# Altium PCB HS-IO-BaseBoard.PcbDoc (part 4 of 4)
Units mm, origin at the board's own origin, x right, y up, seen from the top; angles counter-clockwise.
Board outline 157.7 x 86.4 mm, 6 copper layers (Top Layer, MidLayer1, InternalPlane1, InternalPlane2, MidLayer2, Bottom Layer); 214 components, 240 nets, 782 pads, 260 vias.
Unrouted connection lines stored in the file: 101.
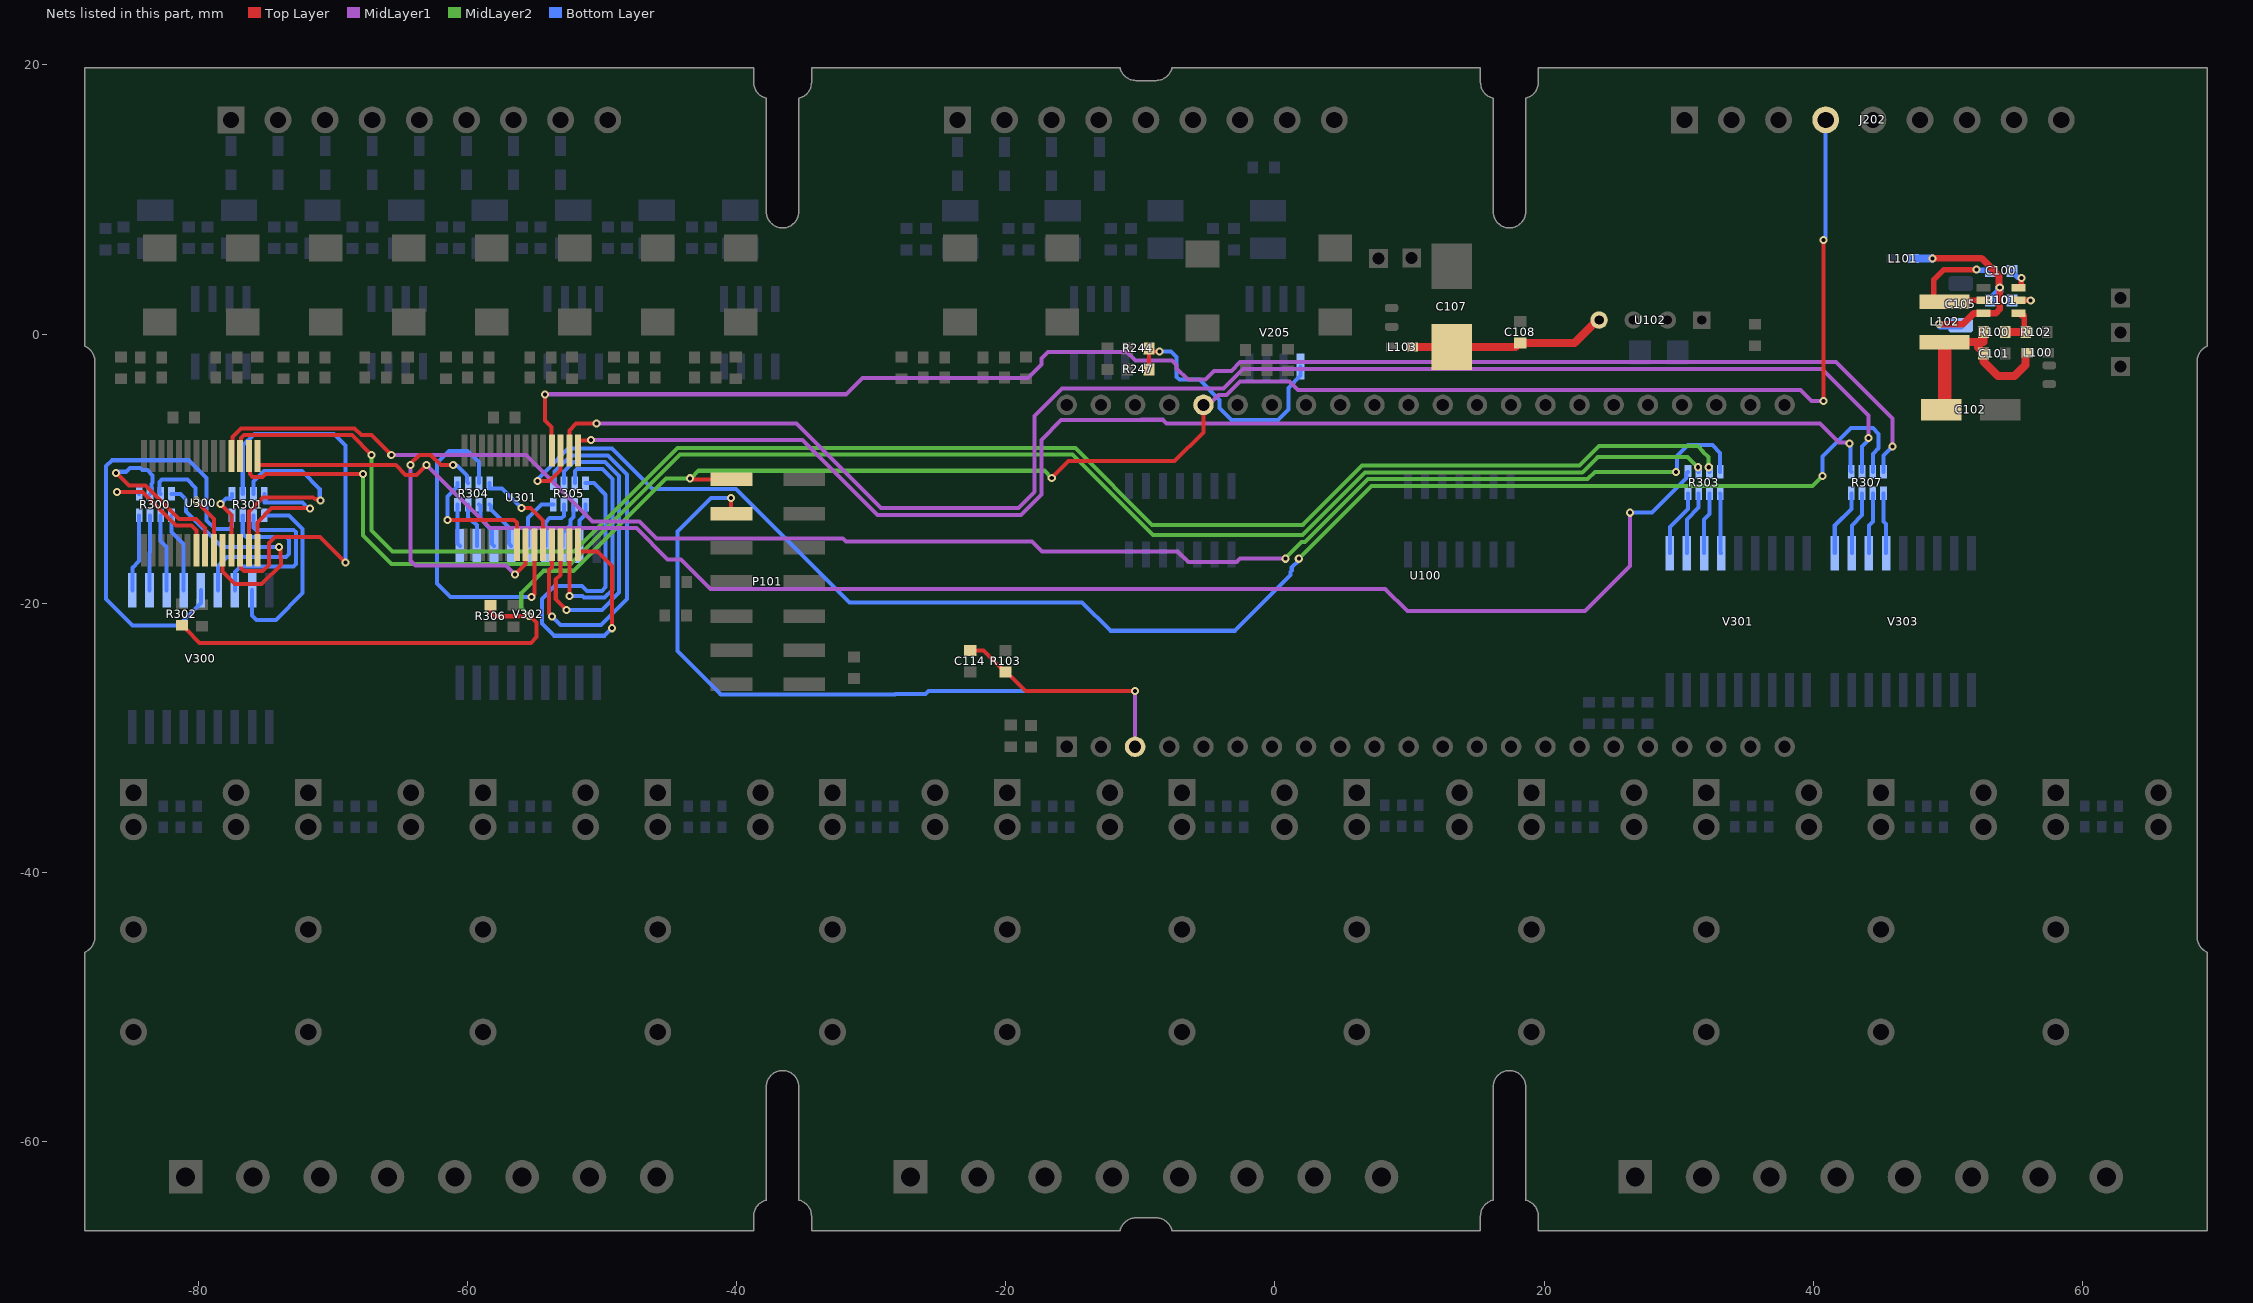
[diagram p7: the nets of this part, all layers, seen from the top]

## Via types
v1: diameter 0.6, hole 0.3, Top Layer to Bottom Layer, 260 vias

## Nets (pads, with @x,y where several pads share a name; then routed paths per layer and width w, separated by ;. In a path a pad name is that pad's centre, name@x,y a point inside that pad or via, vN(x,y) a via of type N, cw(c..) or ccw(c..) an arc to the next point about the centre after c; other vN are vias at no path point) (continued)
NetR244_1: R244.1 R247.1 V205.5 | length 19.2
  Top Layer w0.3: R247.1@-9.357,-2.622 R244.1@-9.357,-1.064 -9.121,-1.301 v1(-8.59,-1.301)
  Bottom Layer w0.3: v1(-8.59,-1.301) -7.71,-1.301 -7.297,-1.713 -7.297,-3.175 -7.088,-3.385 -5.611,-3.385 -4.105,-4.89 -4.105,-5.495 -3.23,-6.37 0.231,-6.37 0.998,-5.604 0.998,-3.992 1.915,-3.075 V205.5@1.915,-2.4
NetR300_1: R300.1 U300.21 | length 10.3
  Top Layer w0.3: v1(-86.029,-11.744) -84.128,-11.744 -81.639,-14.234 -80.485,-14.234 -80.129,-14.589 U300.21@-80.129,-16.058
  Bottom Layer w0.3: v1(-86.029,-11.744) -84.479,-11.744 -84.379,-11.844 R300.1@-84.379,-11.866
NetR300_2: R300.2 U300.22 | length 14.5
  Top Layer w0.3: v1(-86.092,-10.322) -86.072,-10.322 -85.15,-11.244 -83.92,-11.244 -81.431,-13.733 -80.154,-13.733 -79.479,-14.408 U300.22@-79.479,-16.058
  Bottom Layer w0.3: v1(-86.092,-10.322) -85.997,-10.226 -85.35,-10.226 -85.068,-9.944 -84.308,-9.944 -84.144,-10.108 -83.759,-10.108 -83.378,-10.489 -83.378,-11.028 -83.479,-11.129 -83.479,-11.766 R300.2@-83.579,-11.866
NetR300_3: R300.3 U300.23 | length 9.1
  Top Layer w0.3: v1(-80.123,-12.379) -80.123,-12.439 -78.829,-13.733 U300.23@-78.829,-16.058
  Bottom Layer w0.3: R300.3@-82.779,-11.866 -82.878,-11.768 -82.878,-10.976 -82.702,-10.8 -80.807,-10.8 -80.18,-11.426 -80.18,-12.301 v1@-80.123,-12.358
NetR300_4: R300.4 U300.24 | length 18.4
  Top Layer w0.3: U300.24@-78.179,-16.058 -78.179,-17.644 -77.253,-18.57 -75.277,-18.57 -73.849,-17.142 -73.849,-16.695 -73.896,-16.647 -73.896,-15.912 v1(-73.992,-15.816)
  Bottom Layer w0.3: R300.4@-81.979,-11.866 -81.979,-11.871 -81.317,-11.871 -80.885,-12.303 -80.885,-13.167 -78.236,-15.816 v1(-73.992,-15.816)
NetR300_5: R300.5 V300.4 | length 5.9
  Bottom Layer w0.3: R300.5@-81.979,-13.466 -81.979,-14.7 -81.074,-15.605 V300.4@-81.074,-19.028
NetR300_6: R300.6 V300.3 | length 5.7
  Bottom Layer w0.3: R300.6@-82.779,-13.466 -82.779,-15.373 -82.344,-15.808 V300.3@-82.344,-19.028
NetR300_7: R300.7 V300.2 | length 5.6
  Bottom Layer w0.3: V300.2@-83.614,-19.028 -83.614,-16.215 -83.579,-16.18 R300.7@-83.579,-13.466
NetR300_8: R300.8 V300.1 | length 5.8
  Bottom Layer w0.3: V300.1@-84.884,-19.028 -84.884,-17.358 -84.379,-16.853 R300.8@-84.379,-13.466
NetR301_1: R301.1 U300.25 | length 5.1
  Top Layer w0.3: v1(-78.345,-12.608) -77.529,-13.424 U300.25@-77.529,-16.058
  Bottom Layer w0.3: v1(-78.345,-12.608) -78.311,-12.608 -77.92,-12.216 -77.586,-12.216 -77.486,-12.116 R301.1@-77.486,-11.866
NetR301_2: R301.2 U300.26 | length 32.6
  Top Layer w0.3: U300.26@-76.879,-16.058 -76.804,-16.133 -76.804,-17.403 -76.599,-17.608 -75.209,-17.608 -74.742,-17.141 -74.742,-15.506 -74.303,-15.066 -70.935,-15.066 v1(-69.049,-16.952)
  Bottom Layer w0.3: R301.2@-76.686,-11.866 -76.686,-8.29 -75.823,-7.426 -69.913,-7.426 -69.049,-8.29 v1(-69.049,-16.952)
NetR301_3: R301.3 U300.27 | length 16.3
  Top Layer w0.3: U300.27@-76.229,-16.058 -76.229,-13.167 -75.191,-12.129 -71.458,-12.129 -71.328,-12.259 -70.991,-12.259 v1(-70.895,-12.355)
  Bottom Layer w0.3: R301.3@-75.886,-11.866 -75.886,-10.943 -75.113,-10.17 -72.3,-10.17 -70.965,-11.505 -70.965,-12.285 v1(-70.895,-12.355)
NetR301_4: R301.4 U300.28 | length 10.6
  Top Layer w0.3: U300.28@-75.579,-16.058 -75.579,-13.98 -74.535,-12.935 -71.713,-12.935 v1(-71.702,-12.946)
  Bottom Layer w0.3: R301.4@-75.086,-11.866 -75.086,-12.523 -72.26,-12.523 -71.837,-12.946 v1(-71.702,-12.946)
NetR301_5: R301.5 V300.8 | length 14.6
  Bottom Layer w0.3: V300.8@-75.994,-19.028 -75.994,-20.888 -75.657,-21.225 -74.222,-21.225 -72.242,-19.246 -72.242,-14.483 -73.259,-13.466 R301.5@-75.086,-13.466
NetR301_6: R301.6 V300.7 | length 12.7
  Bottom Layer w0.3: V300.7@-77.264,-19.028 -77.264,-17.674 -76.847,-17.256 -72.918,-17.256 -72.742,-17.081 -72.742,-14.714 -72.918,-14.538 -75.711,-14.538 -75.886,-14.363 R301.6@-75.886,-13.466
NetR301_7: R301.7 V300.6 | length 13.5
  Bottom Layer w0.3: V300.6@-78.534,-19.028 -78.534,-17.231 -77.87,-16.566 -73.486,-16.566 -73.242,-16.322 -73.242,-15.242 -73.418,-15.066 -76.446,-15.066 -76.686,-14.826 R301.7@-76.686,-13.466
NetR301_8: R301.8 V300.5 | length 33.8
  Bottom Layer w0.3: V300.5@-79.804,-19.028 -79.804,-19.981 -81.472,-21.648 -84.877,-21.648 -86.854,-19.671 -86.854,-9.814 -86.412,-9.372 -80.693,-9.372 -79.361,-10.703 -79.361,-13.83 -78.725,-14.466 -77.662,-14.466 -77.486,-14.291 R301.8@-77.486,-13.466
NetR303_1: R303.1 U300.1 | length 118.8
  Top Layer w0.3: U300.1@-75.579,-9.058 -75.579,-9.66 -75.504,-9.735 -65.318,-9.735 -64.587,-10.466 -63.779,-10.466 v1(-63.029,-9.716)
  MidLayer1 w0.3: v1(-63.029,-9.716) -58.331,-14.414 -47.432,-14.414 -45.114,-16.732 -44.122,-16.732 -41.918,-18.937 8.195,-18.937 9.845,-20.587 23.023,-20.587 26.379,-17.231 v1(26.379,-13.268)
  Bottom Layer w0.3: v1(26.379,-13.268) 28.001,-13.268 30.286,-10.983 30.287,-10.983 30.581,-10.69 30.581,-10.333 R303.1@30.681,-10.233
NetR303_2: R303.2 U300.2 | length 123.5
  Top Layer w0.3: U300.2@-76.229,-9.058 -76.154,-9.133 -76.154,-10.403 -75.949,-10.608 -75.209,-10.608 -74.986,-10.385 v1(-67.763,-10.385)
  MidLayer2 w0.3: v1(-67.763,-10.385) -67.763,-14.968 -65.65,-17.081 -52.318,-17.081 -44.195,-8.957 -15.034,-8.957 -9.053,-14.939 2.037,-14.939 6.701,-10.275 22.832,-10.275 23.984,-9.123 30.662,-9.123 v1(31.431,-9.892)
  Bottom Layer w0.3: v1(31.431,-9.892) 31.431,-10.183 R303.2@31.481,-10.233
NetR303_3: R303.3 U300.3 | length 126.8
  Top Layer w0.3: U300.3@-76.879,-9.058 -76.804,-8.983 -76.804,-7.713 -76.599,-7.508 -68.574,-7.508 v1(-67.116,-8.966)
  MidLayer2 w0.3: v1(-67.116,-8.966) -67.116,-10.217 -67.113,-10.22 -67.113,-10.758 -67.116,-10.761 -67.116,-14.592 -65.569,-16.139 -52.083,-16.139 -45.405,-9.46 -44.402,-8.457 -14.827,-8.457 -9.12,-14.164 2.065,-14.164 6.454,-9.775 22.625,-9.775 24.077,-8.323 31.437,-8.323 31.818,-8.704 31.818,-8.742 32.218,-9.142 32.218,-9.879 v1(32.231,-9.892)
  Bottom Layer w0.3: v1(32.231,-9.892) 32.281,-9.942 R303.3@32.281,-10.233
NetR303_4: R303.4 U300.4 | length 122.3
  Top Layer w0.3: U300.4@-77.529,-9.058 -77.454,-8.983 -77.454,-7.656 -76.806,-7.008 -68.367,-7.008 -67.867,-7.508 -67.108,-7.508 v1(-65.65,-8.966)
  MidLayer1 w0.3: v1(-65.65,-8.966) -55.654,-8.966 -50.705,-13.914 -47.225,-13.914 -45.95,-15.189 -32.109,-15.189 -31.875,-15.422 -18.033,-15.422 -17.319,-16.137 -7.24,-16.137 -6.44,-16.937 -2.838,-16.937 -2.588,-16.687 v1(0.772,-16.687)
  MidLayer2 w0.3: v1(0.772,-16.687) 0.772,-16.626 1.959,-15.439 2.244,-15.439 6.908,-10.775 23.222,-10.775 23.763,-10.233 v1(29.791,-10.233)
  Bottom Layer w0.3: v1(29.791,-10.233) 29.878,-10.146 29.878,-9.07 30.704,-8.244 32.505,-8.244 33.081,-8.82 R303.4@33.081,-10.233
NetR303_5: R303.5 V301.4 | length 4.5
  Bottom Layer w0.3: R303.5@33.081,-11.833 33.116,-11.868 33.116,-16.243 V301.4@33.151,-16.278
NetR303_6: R303.6 V301.3 | length 4.6
  Bottom Layer w0.3: V301.3@31.881,-16.278 31.881,-13.758 32.281,-13.358 R303.6@32.281,-11.833
NetR303_7: R303.7 V301.2 | length 4.8
  Bottom Layer w0.3: V301.2@30.611,-16.278 30.611,-13.758 31.481,-12.888 R303.7@31.481,-11.833
NetR303_8: R303.8 V301.1 | length 5
  Bottom Layer w0.3: V301.1@29.341,-16.278 29.341,-14.321 30.681,-12.981 R303.8@30.681,-11.833
NetR304_1: R304.1 U301.21 | length 9.9
  Top Layer w0.3: v1(-61.488,-13.802) -56.527,-13.802 -56.315,-14.013 U301.21@-56.315,-15.641
  Bottom Layer w0.3: v1(-61.488,-13.802) -61.488,-12.066 -60.738,-11.316 R304.1@-60.738,-11.066
NetR304_2: R304.2 U301.22 | length 23.7
  Top Layer w0.3: v1(-64.234,-9.716) -64.234,-9.63 -63.57,-8.966 -62.719,-8.966 -61.969,-9.716 v1(-61.048,-9.716) ; v1(-56.451,-17.866) -55.665,-17.081 U301.22@-55.665,-15.641
  MidLayer1 w0.3: v1(-64.234,-9.716) -64.234,-16.837 -63.866,-17.205 -57.111,-17.205 v1(-56.451,-17.866)
  Bottom Layer w0.3: v1(-61.048,-9.716) -60.952,-9.812 -60.747,-9.812 -60.038,-10.521 -60.038,-10.966 R304.2@-59.938,-11.066
NetR304_3: R304.3 U301.23 | length 25.8
  Top Layer w0.3: v1(-55.231,-19.542) -55.015,-19.326 U301.23@-55.015,-15.641
  Bottom Layer w0.3: R304.3@-59.138,-11.066 -59.138,-9.509 -59.977,-8.67 -61.359,-8.67 -62.254,-9.565 -62.254,-18.529 -61.241,-19.542 v1(-55.231,-19.542)
NetR304_4: R304.4 U301.24 | length 7.1
  Top Layer w0.3: v1(-55.968,-12.913) -55.308,-12.913 -54.365,-13.855 U301.24@-54.365,-15.641
  Bottom Layer w0.3: R304.4@-58.338,-11.066 -58.338,-11.465 -57.416,-11.465 v1(-55.968,-12.913)
NetR304_5: R304.5 V302.4 | length 3.7
  Bottom Layer w0.3: R304.5@-58.338,-12.666 -58.238,-12.766 -58.238,-13.03 -56.917,-14.351 -56.917,-15.569 V302.4@-56.749,-15.736
NetR304_6: R304.6 V302.3 | length 3.5
  Bottom Layer w0.3: R304.6@-59.138,-12.666 -59.038,-12.766 -59.038,-13.704 -58.187,-14.555 -58.187,-15.569 V302.3@-58.019,-15.736
NetR304_7: R304.7 V302.2 | length 3.4
  Bottom Layer w0.3: R304.7@-59.938,-12.666 -59.938,-13.676 -59.289,-14.166 V302.2@-59.289,-15.736
NetR304_8: R304.8 V302.1 | length 3.1
  Bottom Layer w0.3: R304.8@-60.738,-12.666 -60.738,-14.441 -60.727,-14.452 -60.727,-15.569 V302.1@-60.559,-15.736
NetR305_1: R305.1 U301.25 | length 28.8
  Top Layer w0.3: v1(-53.715,-20.978) -53.933,-20.761 -53.933,-17.541 -53.715,-17.324 U301.25@-53.715,-15.641
  Bottom Layer w0.3: v1(-53.715,-20.978) -53.094,-21.6 -50.061,-21.6 -48.131,-19.669 -48.131,-10.436 -49.556,-9.01 -52.308,-9.01 -53.515,-10.217 -53.515,-10.966 R305.1@-53.615,-11.066
NetR305_2: R305.2 U301.26 | length 24.1
  Top Layer w0.3: U301.26@-53.065,-15.641 -53.065,-17.88 -53.433,-18.247 -53.433,-19.669 v1(-52.62,-20.482)
  Bottom Layer w0.3: R305.2@-52.815,-11.066 -52.815,-10.224 -52.101,-9.51 -49.763,-9.51 -48.722,-10.551 -48.722,-19.206 -49.998,-20.482 v1(-52.62,-20.482)
NetR305_3: R305.3 U301.27 | length 19.6
  Top Layer w0.3: v1(-52.415,-19.466) U301.27@-52.415,-15.641
  Bottom Layer w0.3: v1(-52.415,-19.466) -51.438,-19.466 -51.323,-19.581 -49.804,-19.581 -49.222,-18.999 -49.222,-10.758 -49.971,-10.01 -51.839,-10.01 -52.015,-10.186 R305.3@-52.015,-11.066
NetR305_4: R305.4 U301.28 | length 29.9
  Top Layer w0.3: U301.28@-51.765,-15.641 -51.765,-16.139 -50.329,-16.139 -49.237,-17.231 v1(-49.237,-21.85)
  Bottom Layer w0.3: R305.4@-51.215,-11.066 -50.59,-11.066 -49.722,-11.934 -49.722,-18.792 -50.011,-19.081 -51.116,-19.081 -51.484,-18.713 -53.509,-18.713 -54.465,-19.669 -54.465,-21.507 -53.564,-22.408 -49.795,-22.408 v1(-49.237,-21.85)
NetR305_5: R305.5 V302.8 | length 3.3
  Bottom Layer w0.3: V302.8@-51.669,-15.736 -51.669,-13.853 -51.215,-13.398 R305.5@-51.215,-12.666
NetR305_6: R305.6 V302.7 | length 3.5
  Bottom Layer w0.3: V302.7@-52.939,-15.736 -52.939,-14.784 -52.347,-14.192 -52.347,-13.824 -52.115,-13.591 -52.115,-12.766 R305.6@-52.015,-12.666
NetR305_7: R305.7 V302.6 | length 4.2
  Bottom Layer w0.3: V302.6@-54.209,-15.736 -54.209,-13.98 -53.904,-13.675 -52.991,-13.675 -52.815,-13.499 R305.7@-52.815,-12.666
NetR305_8: R305.8 V302.5 | length 4.4
  Bottom Layer w0.3: V302.5@-55.479,-15.736 -55.479,-13.643 -54.495,-12.659 -53.615,-12.659 R305.8@-53.615,-12.666
NetR307_1: R307.1 U301.1 | length 105.7
  Top Layer w0.3: U301.1@-51.765,-8.641 -51.765,-7.969 -51.69,-7.894 -50.841,-7.894 v1(-50.806,-7.858)
  MidLayer1 w0.3: v1(-50.806,-7.858) -35.083,-7.858 -29.519,-13.422 -18.862,-13.422 -17.358,-11.919 -17.358,-7.852 -15.877,-6.37 -9.929,-6.37 -9.921,-6.362 -8.319,-6.362 -8.04,-6.641 40.508,-6.641 41.905,-8.038 42.584,-8.038 v1(42.68,-8.133)
  Bottom Layer w0.3: v1(42.68,-8.133) 42.75,-8.204 42.75,-10.163 R307.1@42.821,-10.233
NetR307_2: R307.2 U301.2 | length 114.2
  Top Layer w0.3: U301.2@-52.415,-8.641 -52.415,-7.149 -51.912,-6.646 v1(-50.399,-6.646)
  MidLayer1 w0.3: v1(-50.399,-6.646) -35.538,-6.646 -29.262,-12.922 -19.069,-12.922 -17.858,-11.712 -17.858,-6.075 -15.809,-4.025 -3.816,-4.025 -2.374,-2.583 40.657,-2.583 44.106,-6.032 v1(44.106,-7.719)
  Bottom Layer w0.3: R307.2@43.621,-10.233 43.621,-8.339 44.106,-7.854 v1(44.106,-7.719)
NetR307_3: R307.3 U301.3 | length 120.4
  Top Layer w0.3: v1(-54.774,-10.906) -53.9,-10.906 -53.081,-10.087 -53.081,-8.657 U301.3@-53.065,-8.641
  MidLayer2 w0.3: v1(1.772,-16.687) 7.183,-11.275 39.932,-11.275 v1(40.665,-10.542)
  Bottom Layer w0.3: v1(-54.774,-10.906) -54.774,-10.771 -54.542,-10.538 -54.542,-10.537 -54.015,-10.01 -52.515,-8.51 -49.247,-8.51 -46.241,-11.516 -40.041,-11.516 -31.613,-19.945 -14.321,-19.945 -12.229,-22.037 -2.978,-22.037 1.164,-17.894 1.164,-17.661 1.248,-17.577 1.248,-17.345 1.772,-16.822 v1(1.772,-16.687) ; v1(40.665,-10.542) 40.665,-9.087 42.784,-6.969 44.416,-6.969 44.856,-7.408 44.856,-8.478 44.421,-8.913 R307.3@44.421,-10.233
NetR307_4: R307.4 U301.4 | length 113.5
  Top Layer w0.3: v1(-54.216,-4.482) -54.216,-6.422 -53.824,-6.813 -53.738,-6.9 -53.738,-7.591 U301.4@-53.715,-8.641
  MidLayer1 w0.3: v1(-54.216,-4.482) -54.203,-4.468 -31.862,-4.468 -30.654,-3.26 -18.341,-3.26 -17.35,-2.269 -17.35,-1.824 -16.851,-1.325 -11.006,-1.325 -10.368,-1.963 -7.634,-1.963 -7.297,-2.299 -7.297,-2.549 -6.472,-3.375 -5.172,-3.375 -4.522,-2.725 -3.223,-2.725 -2.581,-2.083 41.668,-2.083 45.871,-6.286 v1(45.871,-8.353)
  Bottom Layer w0.3: R307.4@45.221,-10.233 45.221,-9.003 v1(45.871,-8.353)
NetR307_5: R307.5 V303.4 | length 4.5
  Bottom Layer w0.3: R307.5@45.221,-11.833 45.221,-13.918 45.401,-14.098 V303.4@45.401,-16.278
NetR307_6: R307.6 V303.3 | length 4.6
  Bottom Layer w0.3: V303.3@44.131,-16.278 44.131,-14.208 44.421,-13.918 R307.6@44.421,-11.833
NetR307_7: R307.7 V303.2 | length 4.8
  Bottom Layer w0.3: V303.2@42.861,-16.278 42.861,-14.208 43.621,-13.448 R307.7@43.621,-11.833
NetR307_8: R307.8 V303.1 | length 5
  Bottom Layer w0.3: V303.1@41.591,-16.278 41.591,-14.208 42.821,-12.978 R307.8@42.821,-11.833
P5V: C107.1 C108.2 L103.1 U102.4 | length 14.7
  Top Layer w0.6: L103.1@10.219,-0.959 C107.1@13.129,-0.959 17.879,-0.959 18.179,-0.659 22.265,-0.659 23.97,1.046 U102.4@24.081,1.046
R\E\S\E\T\: J202.4 P101.14 R302.2 R306.2 U100.40 | length 166.6
  Top Layer w0.3: R302.2@-81.204,-21.625 -81.154,-21.625 -80.904,-21.875 -80.904,-21.925 -79.884,-22.946 -55.282,-22.946 -54.85,-22.514 -54.85,-21.422 -55.308,-20.965 -57.99,-20.965 -58.015,-20.939 ; R306.2@-58.269,-20.148 -58.269,-20.685 -58.015,-20.939 ; v1(-55.409,-20.939) -58.015,-20.939 ; v1(-43.458,-10.71) -43.38,-10.788 P101.14@-40.379,-10.788 ; v1(-16.582,-10.695) -15.322,-9.436 -7.452,-9.436 -5.31,-7.294 U100.40@-5.31,-5.258 ; v1(40.771,-4.956) v1(40.771,6.992)
  MidLayer1 w0.3: U100.40@-5.31,-5.258 -4.926,-5.258 -4.192,-4.525 -3.609,-4.525 -2.608,-3.525 1.075,-3.525 1.697,-4.146 39.038,-4.146 39.847,-4.956 v1(40.771,-4.956)
  MidLayer2 w0.3: v1(-55.409,-20.939) -55.993,-20.355 -55.993,-19.237 -54.337,-17.581 -52.111,-17.581 -45.241,-10.71 -43.377,-10.71 -42.816,-10.15 -17.127,-10.15 v1(-16.582,-10.695)
  Bottom Layer w0.3: v1(40.771,6.992) 40.771,7.073 40.921,7.223 J202.4@40.921,15.917
"TASTER RESET": C114.2 P101.12 R103.1 U100.3 | length 68.1
  Top Layer w0.3: v1(-40.398,-12.166) -40.398,-13.31 P101.12@-40.379,-13.328 ; C114.2@-22.633,-23.502 -21.658,-23.502 -20.058,-25.102 -19.958,-25.102 -18.532,-26.528 v1(-10.409,-26.528)
  MidLayer1 w0.3: v1(-10.409,-26.528) -10.399,-26.538 -10.399,-30.649 U100.3@-10.39,-30.658
  Bottom Layer w0.3: v1(-40.398,-12.166) -41.891,-12.166 -44.394,-14.669 -44.394,-23.556 -41.172,-26.778 -28.224,-26.778 -28.179,-26.733 -25.956,-26.733 -25.751,-26.528 v1(-10.409,-26.528)
U304_BST: C100.1 U101.6 | length 1.9
  Top Layer w0.4: U101.6@55.251,3.452 55.363,3.452 55.438,3.527 55.438,4.147 v1(55.476,4.185)
  Bottom Layer w0.4: C100.1@54.751,4.702 54.751,4.652 55.18,4.223 55.438,4.223 v1(55.476,4.185)
U304_EN: R101.1 U101.5 | length 2.3
  Top Layer w0.4: U101.5@55.251,2.502 v1(56.151,2.502)
  Bottom Layer w0.4: R101.1@54.751,2.502 v1(56.151,2.502)
U304_FB: R100.1 R102.2 U101.4 | length 11.3
  Top Layer w0.3: U101.4@55.476,1.527 U101.4@55.476,1.552 ; U101.4@55.251,1.552 U101.4@55.476,1.552 ; U101.4@55.251,1.552 U101.4@55.476,1.552 ; U101.4@55.251,1.552 U101.4@55.476,1.552 ; U101.4@55.251,1.552 U101.4@55.476,1.552 ; U101.4@55.251,1.552 U101.4@55.476,1.552 ; U101.4@55.251,1.552 U101.4@55.476,1.552 ; U101.4@55.251,1.552 U101.4@55.476,1.552 ; U101.4@55.251,1.552 U101.4@55.476,1.552 ; U101.4@55.251,1.552 U101.4@55.476,1.552 ; U101.4@55.251,1.552 U101.4@55.476,1.552 ; U101.4@55.251,1.552 U101.4@55.476,1.552 ; U101.4@55.251,1.552 U101.4@55.476,1.552 ; U101.4@55.251,1.552 U101.4@55.476,1.552 ; U101.4@55.251,1.552 U101.4@55.476,1.552 ; U101.4@55.251,1.552 U101.4@55.476,1.552 ; U101.4@55.251,1.552 U101.4@55.476,1.552 ; U101.4@55.251,1.552 U101.4@55.476,1.552 ; U101.4@55.251,1.552 U101.4@55.476,1.552 ; U101.4@55.251,1.552 U101.4@55.476,1.552
  Top Layer w0.4: U101.4@55.476,1.527 55.526,1.527 U101.4@55.676,1.377 ; R102.2@55.776,0.152 55.676,0.252 U101.4@55.676,1.377 ; U101.4@55.251,1.552 U101.4@55.426,1.377 ; U101.4@55.251,1.552 U101.4@55.426,1.377 ; U101.4@55.251,1.552 U101.4@55.426,1.377 ; U101.4@55.251,1.552 U101.4@55.426,1.377 ; U101.4@55.251,1.552 U101.4@55.426,1.377 ; U101.4@55.251,1.552 U101.4@55.426,1.377 ; U101.4@55.251,1.552 U101.4@55.426,1.377 ; U101.4@55.251,1.552 U101.4@55.426,1.377 ; U101.4@55.426,1.377 U101.4@55.676,1.377 ; U101.4@55.426,1.377 U101.4@55.676,1.377 ; U101.4@55.426,1.377 U101.4@55.676,1.377 ; U101.4@55.426,1.377 U101.4@55.676,1.377 ; U101.4@55.426,1.377 U101.4@55.676,1.377 ; U101.4@55.426,1.377 U101.4@55.676,1.377 ; U101.4@55.426,1.377 U101.4@55.676,1.377 ; U101.4@55.426,1.377 U101.4@55.676,1.377
  Top Layer w0.6: R100.1@54.251,0.152 R102.2@55.776,0.152
U304_SW: C100.2 L102.1 U101.2 | length 9.7
  Top Layer w0.4: L102.1@49.751,2.402 51.051,2.402 51.151,2.502 U101.2@52.651,2.502 ; L102.1@49.751,2.502 49.201,2.502 48.951,2.752 48.951,4.042 49.702,4.793 v1(52.128,4.793)
  Bottom Layer w0.4: v1(52.128,4.793) 52.173,4.748 53.105,4.748 C100.2@53.151,4.702
U304_Vin: C105.1 L101.2 R101.2 U101.3 | length 17.3
  Top Layer w0.5: v1(48.844,5.617) 48.87,5.643 52.48,5.643 53.793,4.329 53.793,3.51 v1(53.851,3.452) 53.851,1.845 53.558,1.552 U101.3@52.651,1.552 52.626,1.527 51.912,1.527 51.126,0.741 v1(49.351,0.741)
  Bottom Layer w0.6: L101.2@47.421,5.617 v1(48.844,5.617) ; v1(49.351,0.741) 49.44,0.652 C105.1@50.951,0.652 ; R101.2@53.151,2.502 53.151,2.552 53.812,3.214 53.812,3.414 v1(53.851,3.452)
Vout: C101.2 C102.1 L100.1 L102.2 R100.2 | length 14.9
  Top Layer w0.6: L102.2@49.751,-0.598 52.226,-0.598 52.226,-0.973 52.651,-1.398 C101.2@52.651,-1.448 52.651,-2.046 53.725,-3.12 54.955,-3.12 55.771,-2.305 55.771,-1.431 55.821,-1.381 L100.1@55.896,-1.381 ; 52.651,-0.598 R100.2@52.651,0.152
  Top Layer w1: C102.1@49.496,-5.608 49.496,-5.563 49.751,-5.308 L102.2@49.751,-0.598
pads on no net: U100.14 U100.21 U100.25 U100.26 U100.28 U100.29 U100.30 U100.31 U100.32 U100.33 U100.34 U100.35 U100.36 U100.37 U100.38 U100.39 U100.41 U100.42 U100.43 U300.5 U300.6 U300.7 U300.8 U300.11 U300.14 U300.19 U300.20 U301.5 U301.6 U301.7 U301.8 U301.11 U301.14 U301.19 U301.20 V301.5 V301.6 V301.7 V301.8 V301.11 V301.12 V301.13 V301.14 V303.5 V303.6 V303.7 V303.8 V303.11 V303.12 V303.13 V303.14

## Polygon pours and split planes (outlines as drawn)
Gnd on InternalPlane1 (split plane): 7.711,11.894 -7.163,11.894 -7.163,19.281 7.711,19.281
Gnd on InternalPlane1 (split plane): 68.756,-0.598 68.636,-0.687 68.512,-0.799 68.399,-0.924 68.299,-1.058 68.213,-1.202 68.141,-1.354 68.084,-1.512 68.044,-1.675 68.019,-1.841 68.011,-2 68.01,-2.008 68.01,-39.058 -87.169,-39.058 -87.169,-2.008 -87.17,-1.999 -87.177,-1.841 -87.202,-1.675 -87.243,-1.512 -87.299,-1.354 -87.371,-1.202 -87.457,-1.058 -87.557,-0.924 -87.67,-0.799 -87.794,-0.687 -87.914,-0.597 -87.915,-0.259 -87.892,-0.261 4.115,-0.261 4.115,-2.176 4.123,-2.306 4.149,-2.435 4.191,-2.559 4.249,-2.677 4.322,-2.786 4.408,-2.884 4.507,-2.971 4.616,-3.043 4.733,-3.101 4.857,-3.144 4.986,-3.169 5.117,-3.178 28.521,-3.178 28.652,-3.169 28.78,-3.144 28.904,-3.101 29.022,-3.043 29.131,-2.971 29.229,-2.884 29.316,-2.786 29.389,-2.677 29.447,-2.559 29.489,-2.435 29.514,-2.306 29.523,-2.176 29.523,7.792 29.514,7.922 29.489,8.051 29.447,8.175 29.389,8.293 29.316,8.402 29.229,8.5 29.131,8.587 29.022,8.659 28.904,8.717 28.78,8.76 28.652,8.785 28.521,8.794 19.103,8.794 19.123,8.924 19.13,9.083 19.131,9.092 19.131,17.17 19.167,17.187 19.313,17.274 19.449,17.375 19.575,17.489 19.689,17.615 19.79,17.751 19.877,17.896 19.949,18.05 20.006,18.209 20.048,18.374 20.073,18.542 20.08,18.703 20.081,18.711 20.081,19.281 68.76,19.281
I-GND on InternalPlane1 (split plane): 175 vertices, not listed, extent -87.919,-1.173 27.519,19.281
12V on InternalPlane2 (split plane): 7.711,11.894 -7.163,11.894 -7.163,19.281 7.711,19.281
12V on InternalPlane2 (split plane): 68.01,-39.058 -87.169,-39.058 -87.169,-32.834 68.01,-32.834
I5V on InternalPlane2 (split plane): 175 vertices, not listed, extent -87.919,-1.173 27.519,19.281
3V3p on InternalPlane2 (split plane): 68.756,-0.598 68.636,-0.687 68.512,-0.799 68.399,-0.924 68.299,-1.058 68.213,-1.202 68.141,-1.354 68.084,-1.512 68.044,-1.675 68.019,-1.841 68.011,-2 68.01,-2.008 68.01,-31.829 -87.169,-31.829 -87.169,-2.008 -87.17,-1.999 -87.177,-1.841 -87.202,-1.675 -87.243,-1.512 -87.299,-1.354 -87.371,-1.202 -87.457,-1.058 -87.557,-0.924 -87.67,-0.799 -87.794,-0.687 -87.914,-0.597 -87.915,-0.259 -87.892,-0.261 4.115,-0.261 4.115,-2.176 4.123,-2.306 4.149,-2.435 4.191,-2.559 4.249,-2.677 4.322,-2.786 4.408,-2.884 4.507,-2.971 4.616,-3.043 4.733,-3.101 4.857,-3.144 4.986,-3.169 5.117,-3.178 28.521,-3.178 28.652,-3.169 28.78,-3.144 28.904,-3.101 29.022,-3.043 29.131,-2.971 29.229,-2.884 29.316,-2.786 29.389,-2.677 29.447,-2.559 29.489,-2.435 29.514,-2.306 29.523,-2.176 29.523,7.792 29.514,7.922 29.489,8.051 29.447,8.175 29.389,8.293 29.316,8.402 29.229,8.5 29.131,8.587 29.022,8.659 28.904,8.717 28.78,8.76 28.652,8.785 28.521,8.794 19.103,8.794 19.123,8.924 19.13,9.083 19.131,9.092 19.131,17.17 19.167,17.187 19.313,17.274 19.449,17.375 19.575,17.489 19.689,17.615 19.79,17.751 19.877,17.896 19.949,18.05 20.006,18.209 20.048,18.374 20.073,18.542 20.08,18.703 20.081,18.711 20.081,19.281 68.76,19.281

## Keep-outs
Top Layer:
  region: -88.429,10.092 -88.429,7.592 69.271,7.592 69.271,10.092
  region: 69.271,-57.158 69.271,-54.658 -88.429,-54.658 -88.429,-57.158
Keep-Out Layer:
  lines w0.1: -87.679,-20.058 -87.679,-2.008 ccw(c-88.879,-2.008) -88.425,-0.898 -88.429,19.792 -38.729,19.792 -38.729,18.711 ccw(c-37.511,18.711) -37.778,17.522 ; -37.879,8.892 ccw(c-36.679,8.892) -35.479,8.892 ; -37.779,9.092 -37.779,17.522 ; -35.381,17.522 ccw(c-35.647,18.711) -34.429,18.711 -34.429,19.792 -11.504,19.792 ; -35.379,9.092 -35.379,17.522 ; -22.679,-66.609 -11.503,-66.609 cw(c-10.329,-66.858) -10.329,-65.658 -8.829,-65.658 cw(c-8.829,-66.858) -7.655,-66.609 15.271,-66.608 15.271,-65.528 cw(c16.489,-65.528) 16.222,-64.339 ; -11.503,19.792 ccw(c-10.329,20.042) -10.329,18.842 -8.829,18.842 ccw(c-8.829,20.042) -7.655,19.792 ; -7.654,19.792 15.271,19.792 15.271,18.711 ccw(c16.489,18.711) 16.222,17.522 ; 16.221,-64.339 16.221,-55.908 cw(c17.421,-55.908) 18.621,-55.908 18.621,-64.339 ; 16.221,17.522 16.221,9.092 ccw(c17.421,9.092) 18.621,9.092 18.621,17.522 ; 18.619,-64.339 cw(c18.353,-65.528) 19.571,-65.528 19.571,-66.608 69.271,-66.608 69.266,-45.919 cw(c69.721,-44.808) 68.521,-44.808 68.521,-2.008 cw(c69.721,-2.008) 69.266,-0.898 69.271,19.792 19.571,19.792 19.571,18.711 cw(c18.353,18.711) 18.619,17.522
  lines w0.5: -88.425,-45.919 -88.429,-66.608 -38.729,-66.608 ; -88.175,-45.919 ccw(c-88.629,-44.808) -87.429,-44.808 ; -87.679,-44.808 -87.679,-16.008 ; -38.734,-66.621 -38.734,-65.54 cw(c-37.516,-65.54) -37.783,-64.352 ; -37.779,-64.339 -37.779,-55.908 cw(c-36.579,-55.908) -35.379,-55.908 -35.379,-64.339 ; -35.381,-64.339 cw(c-35.647,-65.528) -34.429,-65.528 -34.429,-66.608 ; -20.629,-66.608 -34.429,-66.608 ; 16.222,-64.339 ccw(c16.489,-65.528) 15.271,-65.528 15.271,-66.608 -34.429,-66.608 ; 16.226,-64.327 16.226,-55.896 cw(c17.426,-55.896) 18.626,-55.896 18.626,-64.327 ; 18.625,-64.327 cw(c18.358,-65.516) 19.576,-65.516 19.576,-66.596 ; 19.571,-66.608 69.271,-66.608
  lines w3.6: -86.429,-39.608 66.571,-39.608

## Other copper
Top Layer:
  rectangle net 3V3p: -35.958,-26.095 -33.474,-23.582
  rectangle net 12V: -35.95,-21.015 -33.466,-18.502
  region net Vout: 52.251,0.565 51.601,-0.048 51.601,-1.148 52.126,-1.14 52.251,-1.265 53.051,-1.265 53.051,0.565
  region net U304_FB: 55.764,1.277 55.764,1.063 55.875,0.952 55.872,0.949 55.872,0.052 53.854,0.052 53.851,0.056 53.851,0.95 54.399,0.95 54.726,1.277
InternalPlane1 (plane layer: these items are gaps in the copper):
  region: -87.679,-39.058 68.469,-39.058 ccw(c68.469,-38.984) 68.521,-39.036 68.521,-44.808 ccw(c69.402,-44.808) 68.779,-45.432 69.271,-45.924 69.271,-66.608 19.973,-66.608 cw(c21.553,-65.029) 19.319,-65.029 19.319,-64.786 ccw(c19.051,-64.786) 19.24,-64.596 18.621,-63.977 cw(c18.987,-63.61) 18.469,-63.61 18.469,-55.303 cw(c18.469,-54.234) 17.713,-54.99 17.421,-54.698 ccw(c17.421,-55.767) 16.664,-55.011 16.373,-55.303 ccw(c16.739,-55.67) 16.221,-55.67 16.221,-64.338 16.222,-64.339 15.382,-65.179 ccw(c15.651,-65.448) 15.271,-65.448 15.271,-66.608 ccw(c15.16,-66.719) 15.16,-66.563 -7.665,-66.563 ccw(c-7.72,-66.563) -7.681,-66.524 -8.516,-65.689 cw(c-8.808,-65.398) -8.808,-65.81 -10.934,-65.81 ccw(c-10.934,-66.043) -11.099,-65.879 -11.829,-66.609 -11.83,-66.608 -34.429,-66.608 -34.429,-65.394 ccw(c-35.288,-65.394) -34.681,-64.786 -35.251,-64.216 cw(c-34.942,-63.907) -35.379,-63.907 -35.379,-55.67 ccw(c-35.691,-55.67) -35.471,-55.449 -35.969,-54.951 ccw(c-36.579,-55.561) -36.579,-54.698 ccw(c-36.579,-55.767) -37.336,-55.011 -37.627,-55.303 ccw(c-37.261,-55.67) -37.779,-55.67 -37.779,-63.907 cw(c-38.707,-63.907) -38.051,-64.563 -38.698,-65.21 ccw(c-38.622,-65.286) -38.729,-65.286 -38.729,-66.608 -88.429,-66.608 -88.425,-45.919 ccw(c-89.198,-44.545) -87.679,-44.967 -87.679,-39.454
  lines w1: -7.665,19.746 -7.665,11.392 8.213,11.392 8.213,19.719
  lines w2: -87.892,0.741 -41.749,0.741 -26.509,0.741 5.117,0.741 5.117,-2.176 28.521,-2.176 28.521,7.792 18.621,7.792
InternalPlane2 (plane layer: these items are gaps in the copper):
  region: -87.679,-39.058 68.469,-39.058 ccw(c68.469,-38.984) 68.521,-39.036 68.521,-44.808 ccw(c69.402,-44.808) 68.779,-45.432 69.271,-45.924 69.271,-66.608 19.973,-66.608 cw(c21.553,-65.029) 19.319,-65.029 19.319,-64.786 ccw(c19.051,-64.786) 19.24,-64.596 18.621,-63.977 cw(c18.987,-63.61) 18.469,-63.61 18.469,-55.303 cw(c18.469,-54.234) 17.713,-54.99 17.421,-54.698 ccw(c17.42,-55.767) 16.664,-55.011 16.373,-55.303 ccw(c16.739,-55.67) 16.221,-55.67 16.221,-64.338 16.222,-64.339 15.382,-65.179 ccw(c15.65,-65.448) 15.271,-65.448 15.271,-66.608 ccw(c15.16,-66.718) 15.16,-66.563 -7.665,-66.563 ccw(c-7.719,-66.562) -7.681,-66.524 -8.516,-65.689 cw(c-8.808,-65.398) -8.808,-65.81 -10.934,-65.81 ccw(c-10.935,-66.043) -11.099,-65.879 -11.829,-66.609 -11.83,-66.608 -34.429,-66.608 -34.429,-65.394 ccw(c-35.288,-65.394) -34.681,-64.786 -35.251,-64.216 cw(c-34.942,-63.907) -35.379,-63.907 -35.379,-55.67 ccw(c-35.691,-55.67) -35.471,-55.449 -35.969,-54.951 ccw(c-36.579,-55.56) -36.579,-54.698 ccw(c-36.58,-55.767) -37.336,-55.011 -37.627,-55.303 ccw(c-37.261,-55.67) -37.779,-55.67 -37.779,-63.907 cw(c-38.706,-63.907) -38.051,-64.563 -38.698,-65.21 ccw(c-38.623,-65.286) -38.729,-65.286 -38.729,-66.608 -88.429,-66.608 -88.425,-45.919 ccw(c-89.198,-44.545) -87.679,-44.967 -87.679,-39.454
  lines w1: -87.679,-32.331 68.164,-32.331 ; -7.665,19.746 -7.665,11.392 8.213,11.392 8.213,19.719
  lines w2: -87.892,0.741 -41.749,0.741 -26.509,0.741 5.117,0.741 5.117,-2.176 28.521,-2.176 28.521,7.792 18.621,7.792

## Silkscreen, mask and mechanical layers (free items; w line width, h text height)
Top Overlay:
  lines w0.1: 62.783,-31.404 62.783,-5.029 67.283,-5.029 67.283,-31.404 62.783,-31.404
  lines w0.2: -81.815,-1.058 -80.854,-0.5 ; -69.568,-0.898 -68.574,-0.109 ; -63.977,-4.25 -63.752,-5.219 ; -57.376,-0.897 -56.454,-0.109 ; -53.607,-5.219 -53.607,-4.307 ; -47.237,-0.581 -46.413,-0.846 ; -8.388,-3.233 -7.655,-3.247 ; -3.599,-2.172 -3.149,-2.622 ; 56.097,1.154 57.792,1.599
  text "I01" at -78.326,11.617 h0.7
  text "I02" at -74.943,11.617 h0.7
  text "I03" at -71.432,11.617 h0.7
  text "I04" at -67.943,11.617 h0.7
  text "I05" at -64.44,11.617 h0.7
  text "I06" at -60.943,11.617 h0.7
  text "I07" at -57.447,11.617 h0.7
  text "I08" at -53.95,11.617 h0.7
  text "I-GND" at -51.131,11.617 h0.7
  text "I09" at -24.465,11.542 h0.7
  text "I10" at -20.907,11.542 h0.7
  text "I11" at -17.29,11.542 h0.7
  text "I12" at -13.843,11.542 h0.7
  text "I-GND" at -11.082,11.542 h0.7
  text "12V" at -6.936,11.542 h0.7
  text "12V" at -3.476,11.542 h0.7
  text "SDA" at 29.508,11.542 h0.7
  text "SCL" at 32.978,11.542 h0.7
  text "GND" at 36.488,11.542 h0.7
  text "RESET" at 39.288,11.542 h0.7
  text "IO13" at 43.255,11.542 h0.7
  text "IO14" at 46.754,11.542 h0.7
  text "12V" at 50.546,11.542 h0.7
  text "3V3" at 53.988,11.542 h0.7
  text "GND" at 57.488,11.542 h0.7
  text "GND" at -0.023,11.442 h0.7
  text "GND" at 3.527,11.442 h0.7
  text ".VersionControl_RevNumberShort" at 66.91,-20.771 h0.7 r90
  text "'.Version'" at 66.877,-23.104 h0.7 r90
  text "'.Designer'" at 65.41,-23.412 h0.7 r90
  text ".Pcb_File_Name_No_Path" at 64.083,-30.713 h0.7 r90
  text "Designer:" at 65.334,-30.713 h0.7 r90
  text "Version:" at 66.817,-30.713 h0.7 r90
Bottom Overlay:
  lines w0.2: -76.301,10.72 -75.843,11.203 ; -74.223,5.491 -74.076,5.091 ; -72.949,5.418 -72.918,4.791 ; -69.107,4.638 -68.394,5.32 ; -67.105,4.632 -67.036,5.295 ; -61.476,8.78 -61.121,9.982 ; -60.636,5.297 -60.534,4.307
Mechanical 1:
  lines w0.1: -88.429,-0.898 -88.429,19.792 -38.729,19.792 -38.729,18.711 ccw(c-37.511,18.711) -37.778,17.522 ; -88.425,-0.898 cw(c-88.879,-2.008) -87.679,-2.008 -87.679,-44.808 cw(c-88.879,-44.808) -88.425,-45.919 -88.429,-66.608 -38.729,-66.608 ; -39.529,-66.799 -39.529,-65.718 cw(c-38.311,-65.718) -38.578,-64.53 ; -37.782,9.092 ccw(c-36.582,9.092) -35.382,9.092 -35.382,17.522 ; -37.779,-64.339 -37.779,-55.908 cw(c-36.579,-55.908) -35.379,-55.908 -35.379,-64.339 ; -37.779,9.092 -37.779,17.522 ; -35.381,-64.339 cw(c-35.647,-65.528) -34.429,-65.528 -34.429,-66.608 -11.503,-66.609 cw(c-10.329,-66.858) -10.329,-65.658 -8.829,-65.658 cw(c-8.829,-66.858) -7.655,-66.609 15.271,-66.608 15.271,-65.528 cw(c16.489,-65.528) 16.222,-64.339 ; -35.381,17.522 ccw(c-35.647,18.711) -34.429,18.711 -34.429,19.792 -11.504,19.792 ; -11.503,19.792 ccw(c-10.329,20.042) -10.329,18.842 -8.829,18.842 ccw(c-8.829,20.042) -7.655,19.792 ; -7.654,19.792 15.271,19.792 15.271,18.711 ccw(c16.489,18.711) 16.222,17.522 ; 16.221,-64.339 16.221,-55.908 cw(c17.421,-55.908) 18.621,-55.908 18.621,-64.339 ; 16.221,9.092 16.221,17.522 ; 16.23,9.079 ccw(c17.43,9.079) 18.63,9.079 ; 18.619,-64.339 cw(c18.353,-65.528) 19.571,-65.528 19.571,-66.608 69.271,-66.608 69.266,-45.919 cw(c69.721,-44.808) 68.521,-44.808 68.521,-2.008 cw(c69.721,-2.008) 69.266,-0.898 69.271,19.792 19.571,19.792 19.571,18.711 cw(c18.353,18.711) 18.619,17.522 ; 18.621,9.092 18.621,17.522
Selektivloeten:
  circle w0.1: c-59.629,-25.151 r2
  circle w0.1: c-59.629,-32.651 r2
  circle w0.1: c-57.429,15.892 r2
  circle w0.1: c1.93,-5.718 r2
  circle w0.1: c1.93,-8.258 r2
  circle w0.1: c1.93,-10.798 r2
  circle w0.1: c1.871,-13.338 r2
  circle w0.1: c-57.529,4.142 r2
  circle w0.1: c-57.622,1.542 r2
  circle w0.1: c-60.629,-0.208 r2
  circle w0.1: c-60.629,5.892 r2
  circle w0.1: c-80.129,5.892 r2
  circle w0.1: c-80.129,-0.208 r2
  circle w0.1: c-83.229,1.542 r2
  circle w0.1: c-83.229,4.142 r2
  circle w0.1: c-48.083,-31.882 r2
  circle w0.1: c-48.083,-35.663 r2
  circle w0.1: c-39.154,-31.853 r2
  circle w0.1: c-39.154,-35.663 r2
  circle w0.1: c-39.154,-39.473 r2
  circle w0.1: c-48.054,-39.473 r2
  circle w0.1: c-48.083,-43.358 r2
  circle w0.1: c-39.154,-43.358 r2
  circle w0.1: c-38.429,-51.983 r2
  circle w0.1: c-48.48,-51.983 r2
  circle w0.1: c-75.529,-27.056 r2
  circle w0.1: c-85.529,-27.056 r2
  circle w0.1: c-85.654,-32.558 r2
  circle w0.1: c-70.454,-32.558 r2
  circle w0.1: c-70.454,-37.658 r2
  circle w0.1: c-85.654,-37.658 r2
  circle w0.1: c-85.954,-45.008 r2
  circle w0.1: c-73.454,-45.008 r2
  circle w0.1: c-69.02,-46.858 r2
  circle w0.1: c-69.02,-51.858 r2
  circle w0.1: c-84.724,-52.123 r2
  circle w0.1: c-77.104,-52.758 r2
  circle w0.1: c58.861,-45.178 r2
  circle w0.1: c58.861,-52.858 r2
  circle w0.1: c47.661,-45.178 r2
  circle w0.1: c47.661,-52.858 r2
  circle w0.1: c36.461,-45.178 r2
  circle w0.1: c36.461,-52.858 r2
  circle w0.1: c25.261,-45.178 r2
  circle w0.1: c25.261,-52.858 r2
  circle w0.1: c14.061,-45.178 r2
  circle w0.1: c14.061,-52.858 r2
  circle w0.1: c2.861,-45.178 r2
  circle w0.1: c2.861,-52.858 r2
  circle w0.1: c-8.339,-45.178 r2
  circle w0.1: c-8.339,-52.858 r2
  circle w0.1: c-19.539,-52.858 r2
  circle w0.1: c-19.539,-45.178 r2
  circle w0.1: c58.861,-37.558 r2
  circle w0.1: c58.861,-35.018 r2
  circle w0.1: c55.22,-37.558 r2
  circle w0.1: c55.22,-35.018 r2
  circle w0.1: c47.661,-37.558 r2
  circle w0.1: c47.661,-35.018 r2
  circle w0.1: c44.081,-37.558 r2
  circle w0.1: c44.081,-35.018 r2
  circle w0.1: c36.461,-37.558 r2
  circle w0.1: c36.461,-35.018 r2
  circle w0.1: c32.881,-37.558 r2
  circle w0.1: c32.881,-35.018 r2
  circle w0.1: c25.261,-37.558 r2
  circle w0.1: c25.261,-35.018 r2
  circle w0.1: c21.681,-37.558 r2
  circle w0.1: c21.681,-35.018 r2
  circle w0.1: c14.061,-37.558 r2
  circle w0.1: c14.061,-35.018 r2
  circle w0.1: c10.372,-37.558 r2
  circle w0.1: c10.372,-35.018 r2
  circle w0.1: c2.861,-37.558 r2
  circle w0.1: c2.861,-35.018 r2
  circle w0.1: c-0.719,-37.558 r2
  circle w0.1: c-0.719,-35.018 r2
  circle w0.1: c-8.339,-37.558 r2
  circle w0.1: c-8.339,-35.018 r2
  circle w0.1: c-11.919,-37.558 r2
  circle w0.1: c-11.919,-35.018 r2
  circle w0.1: c-19.539,-35.018 r2
  circle w0.1: c-19.539,-37.558 r2
  circle w0.1: c21.491,6.082 r2
  circle w0.1: c21.491,3.542 r2
  circle w0.1: c21.491,1.002 r2
  circle w0.1: c21.491,-1.538 r2
  circle w0.1: c21.491,-4.078 r2
  circle w0.1: c39.351,-9.508 r2
  circle w0.1: c36.811,-9.508 r2
  circle w0.1: c34.271,-9.508 r2
  circle w0.1: c31.731,-9.508 r2
  circle w0.1: c29.191,-9.508 r2
  circle w0.1: c66.593,16.092 r2
  circle w0.1: c63.093,16.069 r2
  circle w0.1: c59.571,16.069 r2
  circle w0.1: c56.093,16.092 r2
  circle w0.1: c52.593,16.069 r2
  circle w0.1: c49.093,16.069 r2
  circle w0.1: c45.593,16.092 r2
  circle w0.1: c42.093,16.092 r2
  circle w0.1: c38.593,16.092 r2
  circle w0.1: c32.721,16.092 r2
  circle w0.1: c29.221,16.092 r2
  circle w0.1: c25.679,16.092 r2
  circle w0.1: c22.221,16.092 r2
  circle w0.1: c12.521,16.092 r2
  circle w0.1: c9.021,16.092 r2
  circle w0.1: c5.521,16.092 r2
  circle w0.1: c2.021,16.092 r2
  circle w0.1: c-3.779,16.092 r2
  circle w0.1: c-7.279,16.092 r2
  circle w0.1: c-10.779,16.092 r2
  circle w0.1: c-14.279,16.092 r2
  circle w0.1: c-43.429,15.892 r2
  circle w0.1: c-46.929,15.892 r2
  circle w0.1: c-50.429,15.892 r2
  circle w0.1: c-60.929,15.892 r2
  circle w0.1: c-64.429,15.892 r2
  circle w0.1: c-67.929,15.892 r2
  circle w0.1: c-71.429,15.892 r2
  circle w0.1: c-74.929,15.892 r2
  circle w0.1: c-78.429,15.892 r2
  circle w0.1: c-81.929,15.892 r2
  circle w0.1: c-85.429,15.892 r2
  circle w0.1: c62.071,-62.908 r2
  circle w0.1: c57.071,-62.908 r2
  circle w0.1: c52.071,-62.908 r2
  circle w0.1: c47.071,-62.908 r2
  circle w0.1: c42.071,-62.908 r2
  circle w0.1: c37.071,-62.908 r2
  circle w0.1: c32.071,-62.908 r2
  circle w0.1: c27.071,-62.908 r2
  circle w0.1: c7.821,-62.908 r2
  circle w0.1: c2.821,-62.908 r2
  circle w0.1: c-2.179,-62.908 r2
  circle w0.1: c-7.179,-62.908 r2
  circle w0.1: c-12.179,-62.908 r2
  circle w0.1: c-17.179,-62.908 r2
  circle w0.1: c-22.179,-62.908 r2
  circle w0.1: c-27.179,-62.908 r2
  circle w0.1: c-84.179,-62.908 r2
  circle w0.1: c-79.179,-62.908 r2
Measure:
  lines w0.1: -87.679,-23.408 68.521,-23.408
  lines w0.254: -9.579,-65.658 -9.579,18.842
Mechanical 15:
  drawing of 264 lines, arcs and shapes, not listed
  text "Layer" at -68.675,58.148 h0.8
  text "Name" at -65.336,58.148 h0.8
  text "Material" at -58.889,58.148 h0.8
  text "Thickness" at -53.093,58.148 h0.8
  text "Constant" at -48.332,58.148 h0.8
  text "Board Layer Stack" at -43.923,58.148 h0.8
  text "Top Overlay" at -65.336,56.548 h0.8
  text "Top Solder" at -65.336,54.948 h0.8
  text "Solder Resist" at -58.889,54.948 h0.8
  text "0,010mm" at -53.093,54.948 h0.8
  text "3.5" at -48.332,54.948 h0.8
  text "1" at -68.675,53.348 h0.8
  text "Top Layer" at -65.336,53.348 h0.8
  text "0,035mm" at -53.093,53.348 h0.8
  text "Dielectric1" at -65.336,51.748 h0.8
  text "FR-4" at -58.889,51.748 h0.8
  text "0,320mm" at -53.093,51.748 h0.8
  text "4.8" at -48.332,51.748 h0.8
  text "2" at -68.676,50.148 h0.8
  text "MidLayer1" at -65.336,50.148 h0.8
  text "0,035mm" at -53.093,50.148 h0.8
  text "Dielectric2" at -65.336,48.548 h0.8
  text "FR-4" at -58.889,48.548 h0.8
  text "0,320mm" at -53.093,48.548 h0.8
  text "4.8" at -48.332,48.548 h0.8
  text "3" at -68.675,46.948 h0.8
  text "InternalPlane1" at -65.336,46.948 h0.8
  text "0,035mm" at -53.093,46.948 h0.8
  text "Dielectric4" at -65.336,45.348 h0.8
  text "FR-4" at -58.889,45.348 h0.8
  text "0,320mm" at -53.093,45.348 h0.8
  text "4.8" at -48.332,45.348 h0.8
  text "4" at -68.675,43.748 h0.8
  text "InternalPlane2" at -65.336,43.748 h0.8
  text "0,035mm" at -53.093,43.748 h0.8
  text "Dielectric5" at -65.336,42.148 h0.8
  text "FR-4" at -58.889,42.148 h0.8
  text "0,320mm" at -53.093,42.148 h0.8
  text "4.8" at -48.332,42.148 h0.8
  text "5" at -68.675,40.548 h0.8
  text "MidLayer2" at -65.336,40.548 h0.8
  text "0,035mm" at -53.093,40.548 h0.8
  text "Dielectric3" at -65.336,38.948 h0.8
  text "FR-4" at -58.889,38.948 h0.8
  text "0,320mm" at -53.093,38.948 h0.8
  text "4.8" at -48.332,38.948 h0.8
  text "6" at -68.675,37.348 h0.8
  text "Bottom Layer" at -65.336,37.348 h0.8
  text "0,035mm" at -53.093,37.348 h0.8
  text "Bottom Solder" at -65.336,35.748 h0.8
  text "Solder Resist" at -58.889,35.748 h0.8
  text "0,010mm" at -53.093,35.748 h0.8
  text "3.5" at -48.332,35.748 h0.8
  text "Bottom Overlay" at -65.336,34.148 h0.8

## Text inside footprints (layer, text, board x,y; h text height)
C102: Top Overlay "+" at 47.71,-5.094 h1.2 r180
P101: Top Overlay "14" at -40.679,-9.758 h1.02 r90; Top Overlay "13" at -33.579,-9.783 h1.02 r90; Top Overlay "1" at -33.579,-27.383 h1.02 r90; Top Overlay "2" at -40.679,-27.658 h1.02 r90